# Altium PCB BMS.PcbDoc (part 2 of 2)
Units mm, origin at the board's own origin, x right, y up, seen from the top; angles counter-clockwise.
Board outline 65 x 65 mm, 2 copper layers (Top Layer, Bottom Layer); 122 components, 118 nets, 436 pads, 115 vias.
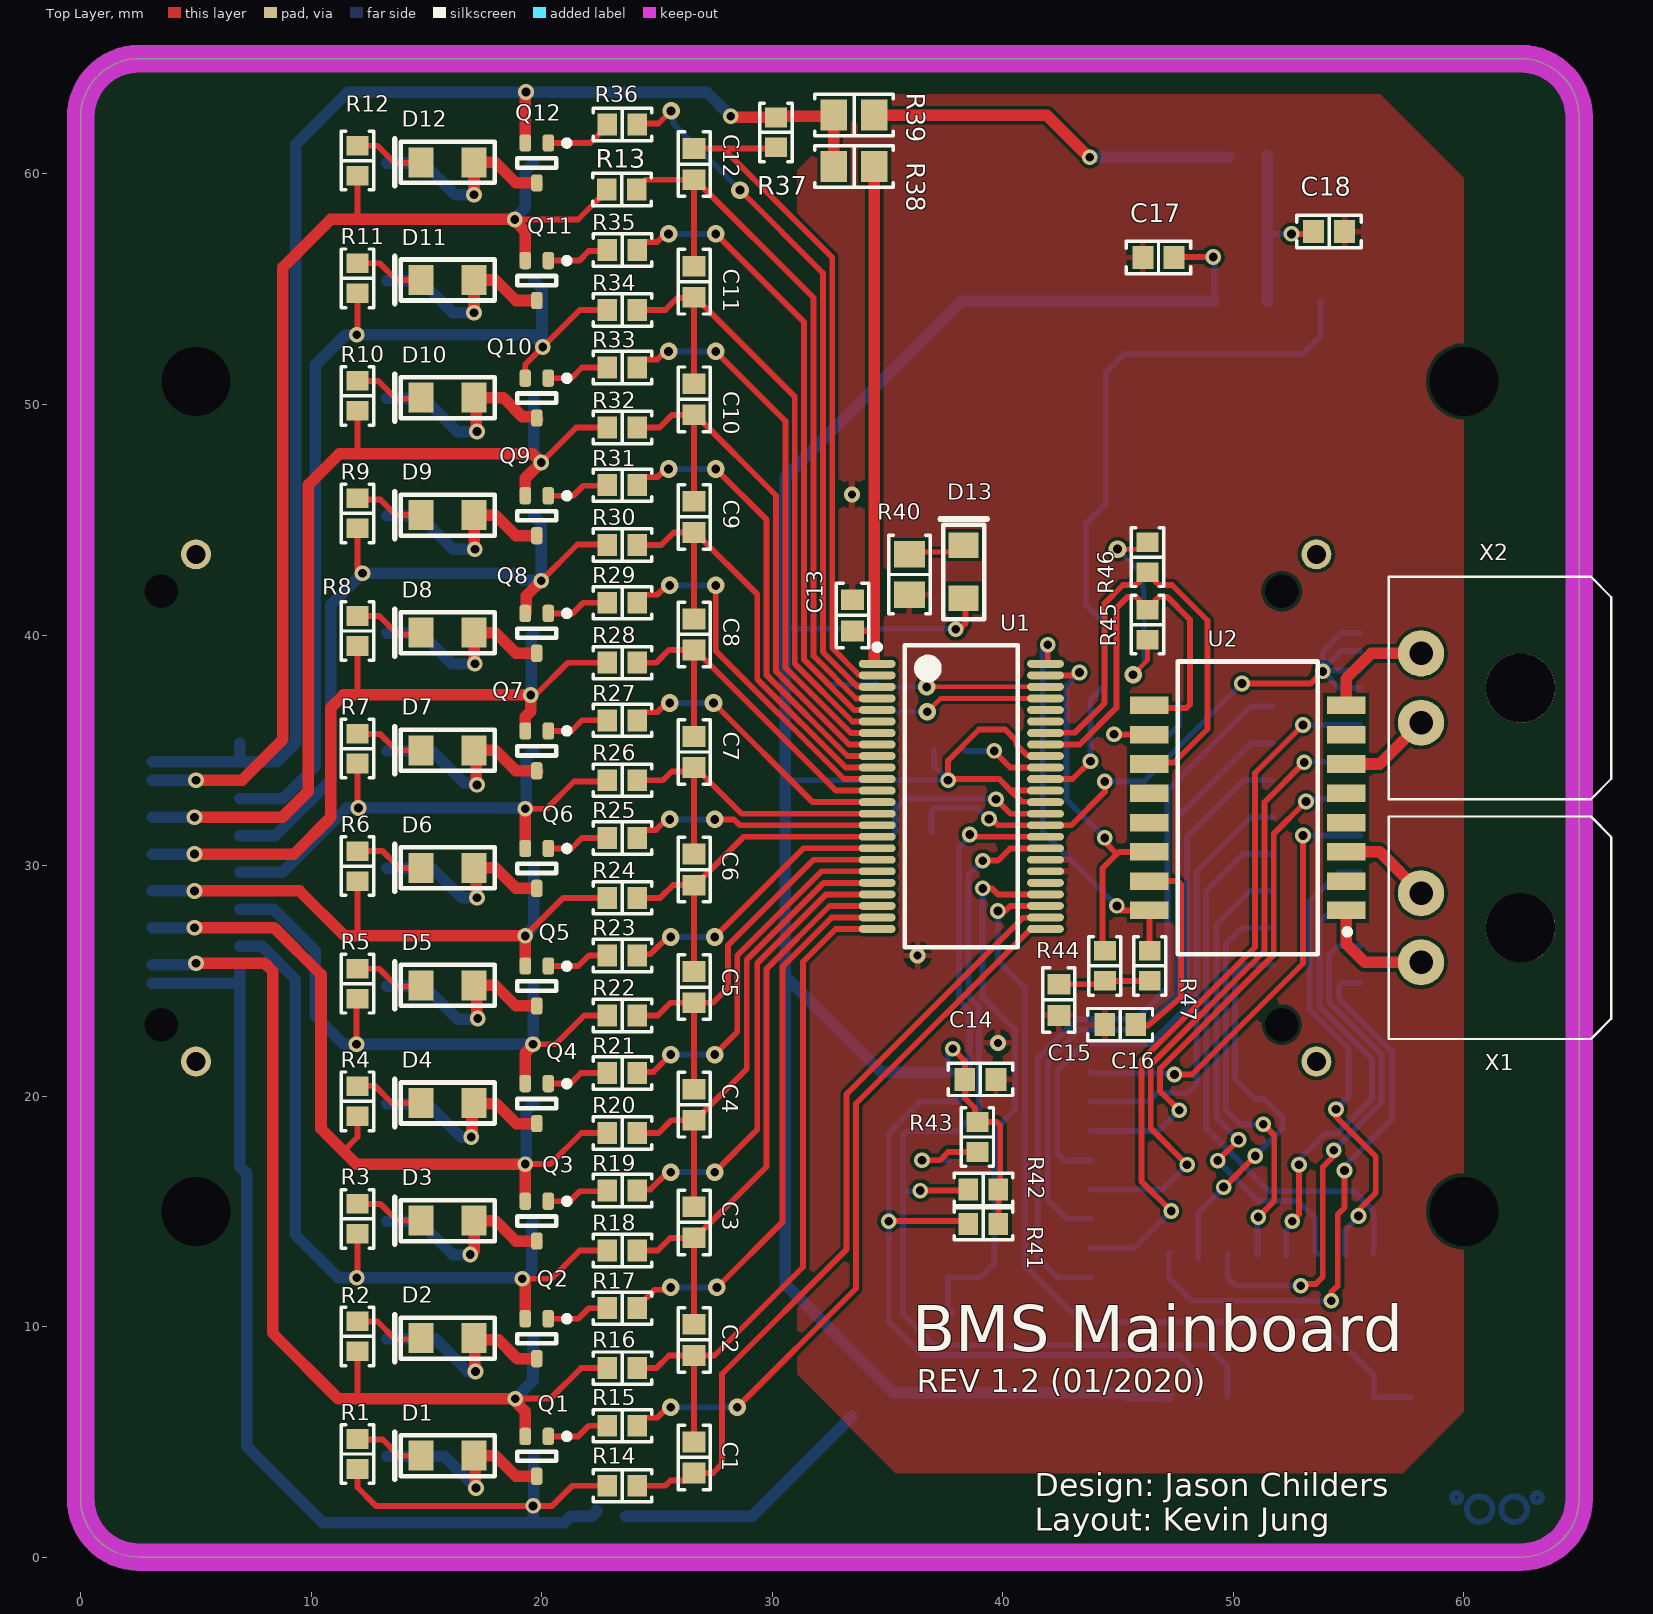
[diagram p0: Top Layer view]

## Via types
v1: diameter 0.681, hole 0.381, Top Layer to Bottom Layer, tented both sides, 84 vias
v2: diameter 0.762, hole 0.381, Top Layer to Bottom Layer, tented both sides, 28 vias
v3: diameter 0.7, hole 0.35, Top Layer to Bottom Layer, tented both sides, 3 vias

## Nets (pads, with @x,y where several pads share a name; then routed paths per layer and width w, separated by ;. In a path a pad name is that pad's centre, name@x,y a point inside that pad or via, vN(x,y) a via of type N, cw(c..) or ccw(c..) an arc to the next point about the centre after c; other vN are vias at no path point) (continued)
temp1: (continued)
  Bottom Layer w0.254: v1(39.785,28.025) 39.785,25.882 40.975,24.692 40.975,22.35 40.975,12.625 43.4,10.2 53.775,10.2 56.09,7.885 U3.9 57.697,6.953 R48.2
temp2: R49.2 U1.28 U4.9 | length 24
  Top Layer w0.254: v1(39.125,29.01) 39.525,29.01 39.785,28.75 U1.28
  Bottom Layer w0.254: R49.2 37.628,10.772 U4.9 39.028,12.14 39.635,12.746 39.635,18.522 40.531,19.419 40.531,22.881 39.125,24.288 v1(39.125,29.01)
v+: C13.2 R38.2 U1.1 | length 22.5
  Top Layer w0.254: C13.2 34.352,40.175 34.425,40.248
  Top Layer w0.5: U1.1@34.425,38.83 34.425,40.248 R38.2
vcc: C18.2 Q13.2 Q13.4 R39.2 | length 24.5
  Top Layer w0.254: v1(52.525,57.4) 53.375,57.4 C18.2
  Top Layer w0.5: R39.2 41.9,62.55 43.725,60.725 v1(43.775,60.725)
  Bottom Layer w0.254: 51.475,57.475 51.55,57.4 v1(52.525,57.4)
  Bottom Layer w0.508: v1(43.775,60.725) Q13.4@49.825,60.725 ; Q13.2 51.475,57.475 Q13.4
pads on no net: U1.29 U1.43 U1.44 U2.2 U2.4 U2.5 U2.7 U2.12 U2.13 X1.MH X2.MH X3.2 X3.3 X3.6 X3.7 X3.10 X3.11 X3.14 X3.15 X3.18 X3.19 X3.22 X3.23 X3.26 X3.27 X3.30 X3.31 X3.G1 X3.G2 X3.MH1 X3.MH2 X4.6 X4.7 X4.10 X4.11 X4.14 X4.15 X4.18 X4.19 X4.22 X4.23 X4.28 X4.29 X4.30 X4.31 X4.32 X4.33 X4.34 X4.35 X4.36 X4.37 X4.38 X4.39 X4.40 X4.G1 X4.G2 X4.MH1 X4.MH2
copper on no net: | length 9.5
  Bottom Layer w0.254: 59.881,2.58 ccw(c59.681,2.58) 59.881,2.58 ; 61.237,2.08 ccw(c60.681,2.08) 61.237,2.08 ; 62.738,2.08 ccw(c62.181,2.08) 62.738,2.08 ; 63.381,2.58 ccw(c63.181,2.58) 63.381,2.58

## Polygon pours and split planes (outlines as drawn)
GND on Top Layer "Top Layer-GND" (solid, pour order 0): 34.375,63.45 56.375,63.45 60,59.825 60,6.3 57.35,3.65 35.359,3.65 31.075,7.934 31.075,60.15
GND on Bottom Layer "Top Layer-No Net" (solid, pour order 4): 33.1,47.075 56.725,47.075 60,43.8 60,5.675 58.025,3.7 31.075,3.7 31.075,45.05

## Keep-outs
Keep-Out Layer:
  the board outline again, w1.2

## Silkscreen, mask and mechanical layers (free items; w line width, h text height)
Top Overlay:
  text "BMS Mainboard" at 36.075,8.925 h2
  text "REV 1.2 (01/2020)" at 36.275,7.15 h1
  text "Design: Jason Childers / Layout: Kevin Jung" at 41.375,1.15 h1

## Text inside footprints (layer, text, board x,y; h text height)
X3: Mechanical 1 "J1" at 53.098,32.009 h0.75 r270
X4: Mechanical 1 "J1" at 4.498,32.009 h0.75 r270